# Altium PCB zhuban.PcbDoc
Units mm, origin at the board's own origin, x right, y up, seen from the top; angles counter-clockwise.
Board outline 69 x 58 mm, 2 copper layers (Top Layer, Bottom Layer); 78 components, 82 nets, 426 pads, 204 vias.
Unrouted connection lines stored in the file: 2.
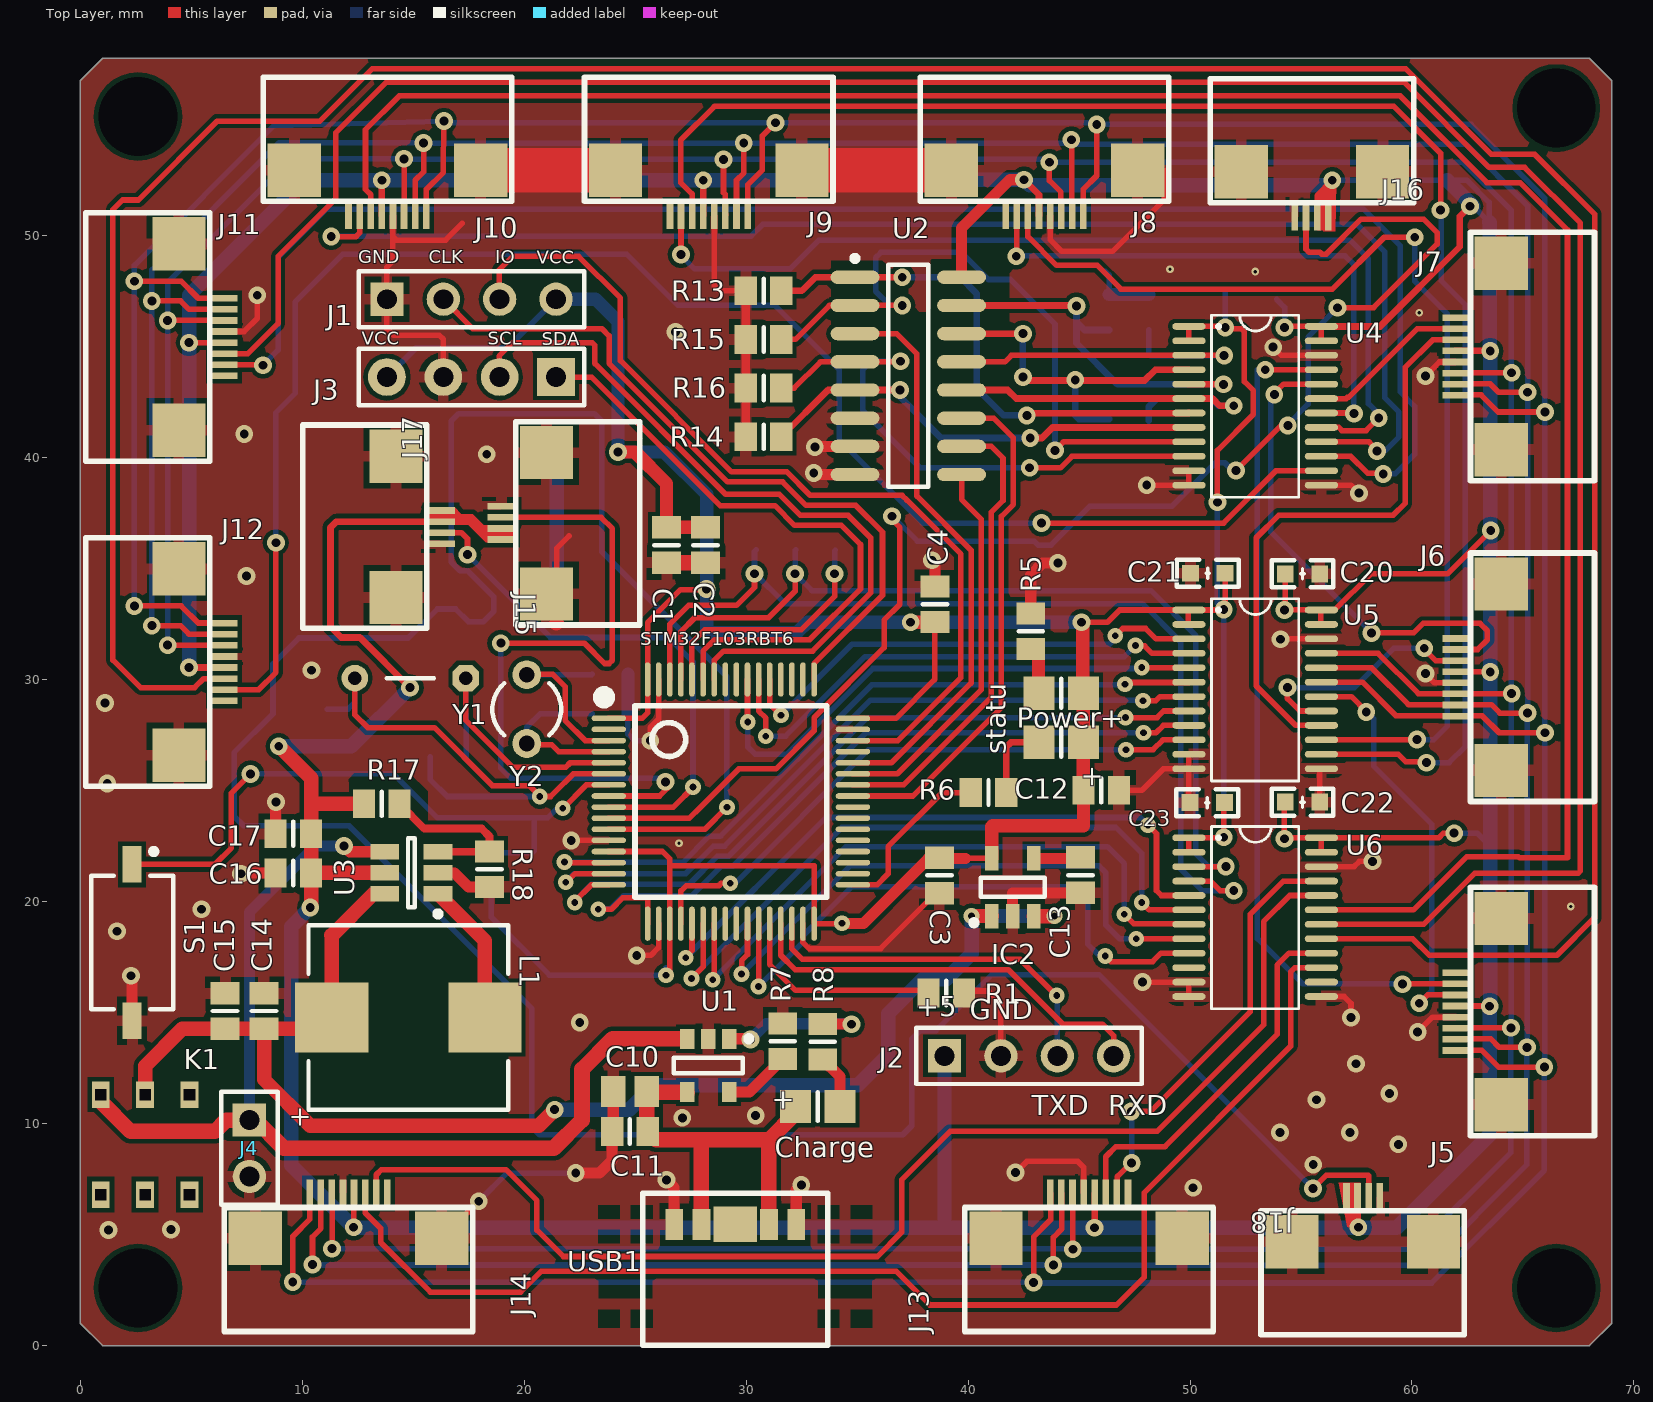
[diagram p0: Top Layer view]
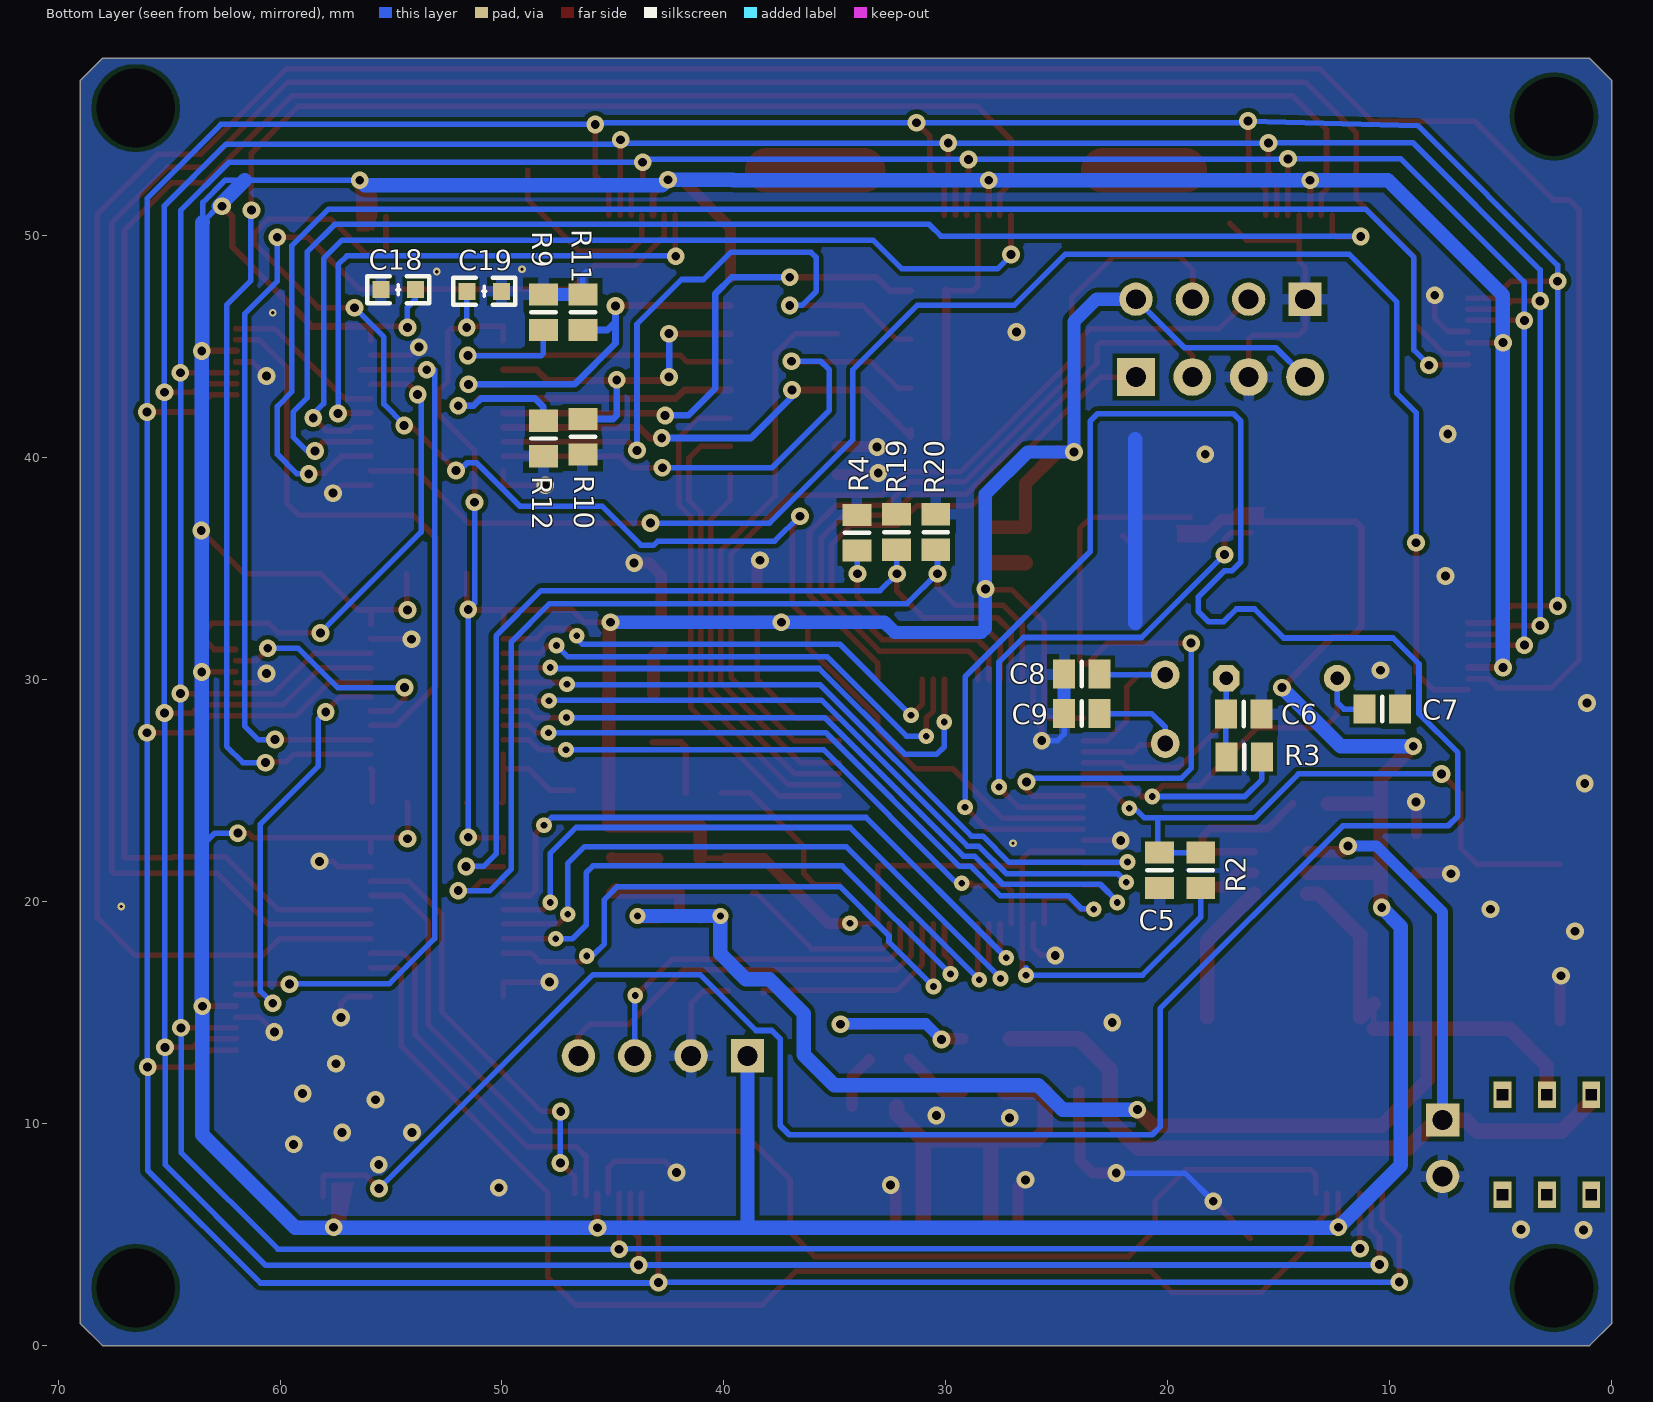
[diagram p1: Bottom Layer view, seen from below]

## Layer stack, top to bottom
Top Solder: solder mask 0.0102, Solder Resist, Dk 3.5
Top Layer: signal copper 0.0356
Dielectric1: dielectric 0.32, FR-4, Dk 4.8
Bottom Layer: signal copper 0.0356
Bottom Solder: solder mask 0.0102, Solder Resist, Dk 3.5

## Board outline
0,1 0,57 1,58 68,58 69,57 69,1 68,0 1,0

## Design rules (kind name [scope] priority, off if disabled: settings)
Clearance [All] p1: gap=0.2 ignorepadtopadclearanceinfootprint=FALSE except(0: Arc-Hole Track-Hole SMDPad-Hole THPad-Hole Via-Hole Fill-Hole Poly-Hole Region-Hole Text-Hole)
Clearance Clearance_1 [InPolygon] p2: gap=0.35 ignorepadtopadclearanceinfootprint=FALSE except(0: Arc-Hole Track-Hole SMDPad-Hole THPad-Hole Via-Hole Fill-Hole Poly-Hole Region-Hole Text-Hole)
ComponentClearance [All] p1 off: gap=0.254 collisioncheckmode=3 verticalgap=0.254 showdistances=FALSE
Height [All] p1 off: minheight=0 maxheight=25.4 prefheight=12.7
HoleSize [All] p1: absolutevalues=TRUE maxlimit=10 minlimit=0.025 maxpercent=80.000 minpercent=20.000
MinimumSolderMaskSliver [All] p1 off: minsoldermaskwidth=0.254
PlaneConnect [All] p1: planeconnectstyle=Relief reliefexpansion=0.508 reliefentries=4 reliefconductorwidth=0.5 reliefairgap=0.3
PolygonConnect PolygonConnect_1 [isvia vs IsPolygon] p1: connectstyle=Direct reliefconductorwidth=0.254 reliefentries=4 polygonreliefangle="90 Angle" airgapwidth=0.254
PolygonConnect [All] p2: connectstyle=Relief reliefconductorwidth=0.5 reliefentries=4 polygonreliefangle="90 Angle" airgapwidth=0.254
RoutingVias [All] p1: holewidth=0.4 width=0.8 viastyle="Through Hole" minholewidth=0.3 minwidth=0.6 maxholewidth=0.508 maxwidth=1.27
SilkToSilkClearance [All] p1 off: silktosilkclearance=0.254
SilkToSolderMaskClearance [IsPad] p1 off: minsilkscreentomaskgap=0.254 clearancetoexposedcopper=TRUE
SolderMaskExpansion [All] p1: expansion=0.102
Width Width_1 [All] p1: maxlimit=10 minlimit=0.1 preferedwidth=0.254 minimp=50.000000 maximp=50.000000 favimp=50.000000
23 further rules are at their usual default settings.

## Classes and differential pairs
component class Sheet1: C1 C2 C3 C4 C5 C6 C7 C8 C9 C10 C11 C12 C13 C14 C15 C16 C17 Charge IC1 IC2 J1 J2 J3 J4 J5 J6 J7 J8 J9 J10 J11 J12 J13 J14 K1 L1 Power R1 R2 R3 R4 R5 R6 R7 R8 R9 R10 R11 R12 R13 R14 R15 R16 R17 R18 R19 R20 S1 statu swd U1 U2 U3 USB1 Y1 Y2
net class Power: +5 BAT BAT+ POWER VCC3.3

## Components (designator, comment, footprint, x,y, rotation, side; value= is the part's Value field where it differs from the comment)
C1 "0.1uf" 6-0805_L 26.416,36.068 r90 top
C2 "1uf" 6-0805_L 28.169,36.068 r90 top
C3 "0.1uf" 6-0805_L 38.71,21.184 r90 top
C4 "0.1uf" 6-0805_L 38.506,33.401 r270 top
C5 "0.1uf" 6-0805_L 20.371,21.412 r90 bottom
C6 "22pF" 6-0805_L 16.586,28.448 r0 bottom
C7 "22pF" 6-0805_L 10.338,28.677 r0 bottom
C8 "22pF" 6-0805_L 23.876,30.251 r180 bottom
C9 "22pF" 6-0805_L 23.876,28.473 r180 bottom
C10 "1uF" C0805 24.765,11.449 r180 top
C11 "0.1uf" 6-0805_L 24.765,9.652 r0 top
C12 "2.2uF" 6-0805_L 45.999,25.019 r180 top
C13 "470pF" 6-0805_L 45.06,21.199 r90 top
C14 "10uF" 6-0805_L 8.28,15.075 r270 top
C15 "0.1uF" 6-0805_L 6.528,15.075 r270 top
C16 "0.1uf" 6-0805_L 9.601,21.285 r0 top
C17 "22uf" 6-0805_L 9.601,23.063 r0 top
C18 "Cap" "C 0603_L" 54.671,47.574 r180 bottom
C19 "Cap" "C 0603_L" 50.8,47.498 r0 bottom
C20 "Cap" "C 0603_L" 55.067,34.773 r180 top
C21 "Cap" "C 0603_L" 50.8,34.798 r0 top
C22 "Cap" "C 0603_L" 55.067,24.486 r180 top
C23 "Cap" "C 0603_L" 50.775,24.46 r0 top
Charge "LED_Green" 6-0805_M 33.223,10.77 r0 top
IC2 "MIC5205-3.3" SOT-23-5 42.012,20.65 r90 top
J1 "CON4" HDR1X4 13.818,47.142 r0 top
J2 "蓝牙" HDR1X4 38.938,13.056 r0 top
J3 "CON4" HDR2.54-LI-4P 17.628,43.637 r180 top
J4 "BAT" HDR1X2 7.62,10.16 r270 top
J5 "CON7" 8P软排线 62,15.047 r90 top locked
J6 "CON7" 8P软排线 62,30.111 r90 top locked
J7 "CON7" 8P软排线 62,44.565 r90 top locked
J8 "CON7" 8P软排线 43.446,50.927 r180 top
J9 "CON7" 8P软排线 28.317,50.927 r180 top locked
J10 "CON7" 8P软排线 13.839,50.927 r180 top locked
J11 "CON7" 8P软排线 6.47,45.438 r270 top locked
J12 "CON7" 8P软排线 6.47,30.8 r270 top locked
J13 "CON7" 8P软排线 45.454,6.858 r0 top locked
J14 "CON7" 8P软排线 12.085,6.858 r0 top locked
J15 "CON4" 软排线4p 20.759,26.128 r90 top
J16 "CON4" 软排线4p 66.412,52.636 r180 top
J17 "CON4" 软排线4p 14.471,47.812 r270 top
J18 "CON4" 软排线4p 46.86,4.928 r0 top
K1 "BUTTON" switch 4.921,11.303 r270 top
L1 "10UH" 0850 14.783,14.783 r0 top
Power "LED_Red" 6-0805_M 44.196,29.388 r180 top
R1 "10K" 6-0805_L 39.014,15.888 r0 top
R2 "10K" 6-0805_L 18.517,21.412 r270 bottom
R3 "10M" 6-0805_L 16.561,26.518 r180 bottom
R4 "10K" 6-0805_L 34.011,36.627 r270 bottom
R5 "1K" 6-0805_L 42.824,32.182 r270 top
R6 "1K" 6-0805_L 40.919,24.917 r0 top
R7 "330" 6-0805_L 31.648,13.716 r90 top
R8 "330" 6-0805_L 33.452,13.691 r270 top
R9 "10K" 6-0805_L 48.133,46.558 r270 bottom
R10 "10K" 6-0805_L 46.355,40.945 r90 bottom
R11 "10K" 6-0805_L 46.355,46.558 r270 bottom
R12 "10K" 6-0805_L 48.133,40.869 r90 bottom
R13 "10K" 6-0805_L 30.785,47.523 r0 top
R14 "10K" 6-0805_L 30.785,40.945 r0 top
R15 "10K" 6-0805_L 30.785,45.331 r0 top
R16 "10K" 6-0805_L 30.785,43.138 r0 top
R17 "525K" 6-0805_L 13.589,24.409 r0 top
R18 "100k" 6-0805_L 18.44,21.463 r270 top
R19 "10K" 6-0805_L 32.233,36.652 r270 bottom
R20 "10K" 6-0805_L 30.455,36.652 r270 bottom
S1 "KEY_2P" button 2.337,18.161 r270 top
statu "LED_Blue" 6-0805_M 44.196,27.178 r180 top (schematic designator Statu)
STM32F103RBT6 "STM32F103RBT6" "LQFP64 10x10_L" 29.312,24.511 r270 top locked
U1 "PW4054" SOT-23-CT5_L 28.296,12.624 r270 top
U2 "CD4051BCM" M16A_N 37.306,43.688 r0 top
U3 "PS7516" SOT23-6_M 14.916,21.3 r180 top
U4 "SN74LVC8T245" SN74LVC8T245 52.934,42.342 r270 top locked
U5 "SN74LVC8T245" SN74LVC8T245 52.934,29.566 r270 top locked
U6 "SN74LVC8T245" SN74LVC8T245 52.934,19.304 r270 top locked
USB1 "USB" Type-C 29.508,5.461 r0 top locked
Y1 "XTAL_8M" xtal 17.374,30.074 r180 top
Y2 "XTAL_32.768K" R38 20.117,28.677 r0 top

## Footprints (in the part's own frame and the unit in brackets; to place one, negate y for a bottom-side part, rotate by r counter-clockwise, add the part's x,y. Pads: shape width x height; smd on the part's side, far side on the other; paste and mask are expansions set on the pad)
6-0805_L [mm] "Chip Resistor, Body 2.0x1.2mm, IPC High Density"
  rect 1x1.3 smd: 1(-0.8,0) 2(0.8,0)
  silkscreen extent 0,-0.55 0,0.55, body extent -1.07,-0.7 1.07,0.7, height 0.7
6-0805_M [mm] "Chip Resistor, Body 2.0x1.2mm, IPC Low Density"
  rect 1.4x1.5 smd: 1(-1,0) 2(1,0)
  silkscreen extent 0,-0.65 0,0.65, body extent -1.07,-0.7 1.07,0.7, height 0.7
8P软排线 [mm] "8P母座"
  rect 0.3x1.25 smd: 1(-1.75,0) 2(-1.25,0) 3(-0.75,0) 4(-0.25,0) 5(0.25,0) 6(0.75,0) 7(1.25,0) 8(1.75,0)
  rect 2.4x2.4 smd: ""(-4.2,-2.025) ""(4.2,-2.025)
  silkscreen extent -5.6,-6.22 5.6,-0.63
0850 [mm] "电感"
  rect 3.3x3.15 smd: 1(-3.45,0) 2(3.45,0)
  silkscreen extent -4.5,-4.15 4.5,4.15, body extent -4.5,-4.15 4.5,4.15, height 5
button [mm] "SODFL, 2-Leads, Body 3.70x8.00mm, IPC Medium Density"
  rect 1.65x0.85 smd: 1(-3.525,0) 2(3.525,0)
  silkscreen extent -4.22,-1.85 3,1.85, body extent -3,-1.85 3,1.85, height 2.5
C0805 [mm] "Chip Capacitor, Body 2.0x1.3mm, IPC High Density"
  rect 1.1x1.4 smd: 1(-0.75,0) 2(0.75,0)
  body extent -1.1,-0.72 1.1,0.72, height 1.4
"C 0603_L" [mil] "无极性贴片电容"
  rect 30x30 smd: 1(-30.59,0) 2(30.59,0)
  silkscreen extent -55,-24 55,24, body extent -31,-16 31,16, height 32
HDR1X2 [mm] "Connector; Header; 2 Position"
  rect 1.5x1.5 hole 0.9: 1(0,0)
  round 1.5 hole 0.9: 2(2.54,0)
  silkscreen extent -1.27,-1.27 3.81,1.27
HDR1X4 [mm] "Connector; Header; 4 Position"
  rect 1.5x1.5 hole 0.9: 1(0,0)
  round 1.5 hole 0.9: 2(2.54,0) 3(5.08,0) 4(7.62,0)
  silkscreen extent -1.27,-1.27 8.89,1.27, body extent -1.27,-1.27 8.89,1.27, height 8.38
HDR2.54-LI-4P [mm] "排针，4脚"
  rect 1.7x1.7 hole 0.9: 1(-3.81,0)
  round 1.7 hole 0.9: 2(-1.27,0) 3(1.27,0) 4(3.81,0)
  silkscreen extent -5.08,-1.27 5.08,1.27, body extent -5.08,-1.27 5.08,1.27, height 8.5
"LQFP64 10x10_L" [mm] "64脚，体宽10x10mm，脚距0.5mm"
  oval 0.25x1.55 smd: 1(-3.75,-5.5) 2(-3.25,-5.5) 3(-2.75,-5.5) 4(-2.25,-5.5) 5(-1.75,-5.5) 6(-1.25,-5.5) 7(-0.75,-5.5) 8(-0.25,-5.5) 9(0.25,-5.5) 10(0.75,-5.5) 11(1.25,-5.5) 12(1.75,-5.5) 13(2.25,-5.5) 14(2.75,-5.5) 15(3.25,-5.5) 16(3.75,-5.5) 33(3.75,5.5) 34(3.25,5.5) 35(2.75,5.5) 36(2.25,5.5) 37(1.75,5.5) 38(1.25,5.5) 39(0.75,5.5) 40(0.25,5.5) 41(-0.25,5.5) 42(-0.75,5.5) 43(-1.25,5.5) 44(-1.75,5.5) 45(-2.25,5.5) 46(-2.75,5.5) 47(-3.25,5.5) 48(-3.75,5.5)
  oval 1.55x0.25 smd: 17(5.5,-3.75) 18(5.5,-3.25) 19(5.5,-2.75) 20(5.5,-2.25) 21(5.5,-1.75) 22(5.5,-1.25) 23(5.5,-0.75) 24(5.5,-0.25) 25(5.5,0.25) 26(5.5,0.75) 27(5.5,1.25) 28(5.5,1.75) 29(5.5,2.25) 30(5.5,2.75) 31(5.5,3.25) 32(5.5,3.75) 49(-5.499,3.75) 50(-5.499,3.25) 51(-5.499,2.75) 52(-5.499,2.25) 53(-5.499,1.75) 54(-5.499,1.25) 55(-5.499,0.75) 56(-5.499,0.25) 57(-5.499,-0.25) 58(-5.499,-0.75) 59(-5.499,-1.25) 60(-5.499,-1.75) 61(-5.499,-2.25) 62(-5.499,-2.75) 63(-5.499,-3.25) 64(-5.499,-3.75)
  silkscreen extent -4.95,-5.96 4.32,4.32, body extent -6,-6 6,6, height 1.45
M16A_N [mm] "SOIC, 16-Leads, Body 9.9x3.9mm, Pitch 1.27mm, IPC Medium Density"
  oval 2.2x0.6 smd: 1(-2.4,4.445) 2(-2.4,3.175) 3(-2.4,1.905) 4(-2.4,0.635) 5(-2.4,-0.635) 6(-2.4,-1.905) 7(-2.4,-3.175) 8(-2.4,-4.445) 9(2.4,-4.445) 10(2.4,-3.175) 11(2.4,-1.905) 12(2.4,-0.635) 13(2.4,0.635) 14(2.4,1.905) 15(2.4,3.175) 16(2.4,4.445)
  silkscreen extent -2.52,-5 0.9,5.42, body extent -2,-5 2,5, height 1.75
R38 [mm] "Crystal, Thru-Hole; 2 Leads; Body 3.1 x 8.2 mm (Dia.xH)"
  round 1.3 hole 0.7: 1(0,1.55) 2(0,-1.55)
  silkscreen extent -1.55,-1.19 1.55,1.17
SN74LVC8T245 [mm]
  oval 0.3x1.5 smd mask+0.102: 1(-3.575,-2.985) 2(-2.925,-2.985) 3(-2.275,-2.985) 4(-1.625,-2.985) 5(-0.975,-2.984) 6(-0.325,-2.984) 7(0.325,-2.984) 8(0.975,-2.984) 9(1.625,-2.984) 10(2.275,-2.984) 11(2.925,-2.984) 12(3.575,-2.984) 13(3.575,2.985) 14(2.925,2.985) 15(2.275,2.985) 16(1.625,2.985) 17(0.975,2.984) 18(0.325,2.984) 19(-0.325,2.984) 20(-0.975,2.984) 21(-1.625,2.984) 22(-2.275,2.984) 23(-2.925,2.984) 24(-3.575,2.984)
  silkscreen extent -4.08,-1.97 4.13,1.97, body extent -3.95,-3.25 3.95,3.3, height 1.2
SOT23-6_M [mm] "SOT23, 6-Leads, Body 2.9x1.6mm, Pitch 0.95mm, Lead Span 2.7mm, IPC Low Density"
  rect 1.3x0.7 smd: 1(-1.2,0.95) 2(-1.2,0) 3(-1.2,-0.95) 4(1.2,-0.95) 5(1.2,0) 6(1.2,0.95)
  silkscreen extent -1.33,-1.55 0.15,1.97, body extent -0.9,-1.55 0.9,1.55, height 1.45
SOT-23-5 [mm]
  rect 1.1x0.6 smd: 1(-1.3,0.95) 2(-1.3,0) 3(-1.3,-0.95) 4(1.3,-0.95) 5(1.3,0.95)
  silkscreen extent -1.72,-1.45 0.42,1.87, body extent -1.37,-1.45 1.43,1.45, height 1.45
SOT-23-CT5_L [mm] "SOT23, 5-Leads, Body 2.9x1.6mm, Pitch 0.95mm, Lead Span 2.7mm, IPC High Density"
  rect 0.9x0.65 smd: 1(-1.2,0.95) 2(-1.2,0) 3(-1.2,-0.95) 4(1.2,-0.95) 5(1.2,0.95)
  silkscreen extent -1.32,-1.55 0.35,1.95, body extent -0.9,-1.55 0.9,1.55, height 1.45
switch [mm]
  rect 1.2x0.8 hole 0.5 square: 1(0,0) 2(0,-2) 3(0,-4) 4(4.5,0) 5(4.5,-2) 6(4.5,-4)
Type-C [mm] "贴片母头"
  rect 0.8x1.4 smd: 1(-2.75,0) 1(2.75,0) 2(-1.52,0) 2(1.52,0) ""(-0.5,0) ""(0.5,0)
  rect 1.95x1.2 smd: ""(0,0) ""(0,0)
  rect 1.95x1.6 smd: ""(0,0) ""(0,0)
  silkscreen extent -4.17,-5.44 4.17,1.4
xtal [mm]
  oct 1.2x1.2 hole 0.6: 1(0,0)
  round 1.2 hole 0.6: 2(5,0)
  silkscreen extent 1.43,0 3.56,0
软排线4p [mm]
  rect 0.3x1.25 smd: 1(11.688,1.778) 2(11.188,1.778) 3(10.688,1.778) 4(10.188,1.778)
  rect 2.4x2.4 smd: ""(7.738,-0.247) ""(14.106,-0.247)
  silkscreen extent 6.34,-4.45 15.49,1.14

## Part data
C1 C2 C3 C4 C5 C6 C7 C8 C9 C11 C12 C13 C14 C15 C16 C17: library part "Cap Semi", "Capacitor (Semiconductor SIM Model)"
C10: library part "Cap Pol3", "Polarized Capacitor (Surface Mount)"
C18 C19 C20 C21 C22 C23: "Capacitor"
Charge Power statu: library part LED, "LED"
IC2: "稳压"
J1: "连接器"
J2: library part CON4, "Connector"
J3 J5 J6 J7 J8 J9 J10 J11 J12 J13 J14 J15 J16 J17 J18: "Connector"
J4 USB1: library part CON2, "Conjunctor"
K1: "自锁按键"
L1: library part Inductor, "电感"
R1 R2 R3 R4 R5 R6 R7 R8 R9 R10 R11 R12 R13 R14 R15 R16 R17 R18 R19 R20: library part Res3, "Resistor"
S1: "轻触按键2P"
STM32F103RBT6: "STM32 ARM-based 32-bit MCU with 128 Kbytes Flash, 64-pin LQFP, Industrial Temperature"
U2: "8-Channel Analog Multiplexer/Demultiplexer"
Y1 Y2: library part XTAL, "Crystal Oscillator"

## Free pads (board coordinates)
  rect 1.2x0.8 hole 3.556: ""(2.6,2.6) ""(2.6,55.372) ""(66.5,2.6) ""(66.5,55.753)

## Via types
v1: diameter 0.8, hole 0.4, Top Layer to Bottom Layer, tented both sides, 157 vias
v2: diameter 0.711, hole 0.305, Top Layer to Bottom Layer, tented both sides, 35 vias
v3: diameter 0.8, hole 0.4, Top Layer to Bottom Layer, 7 vias
v4: diameter 0.35, hole 0.15, Top Layer to Bottom Layer, tented both sides, 5 vias

## Nets (pads, with @x,y where several pads share a name; then routed paths per layer and width w, separated by ;. In a path a pad name is that pad's centre, name@x,y a point inside that pad or via, vN(x,y) a via of type N, cw(c..) or ccw(c..) an arc to the next point about the centre after c; other vN are vias at no path point)
+5: C16.2 C17.2 C18.2 C20.2 C22.2 J2.1 J5.5 J6.5 J7.5 J8.5 J9.5 J10.5 J11.5 J12.5 J13.5 J14.5 J15.3 J15.4 J16.3 J16.4 J17.3 J17.4 J18.3 J18.4 R17.1 U2.16 U3.5 U4.23 U4.24 U5.23 U5.24 U6.23 U6.24 | length 298.9
  Top Layer w0.25: v1@4.978,45.187 J11.5@6.477,45.187 ; v1@12.328,5.293 J14.5@12.328,6.858 ; v1(54.254,22.835) 54.254,24.45 C22.2 ; v1@54.254,33.096 v1(54.254,33.147) ; v1(54.254,45.872) 54.299,45.917 U4.24 U4.23 ; C20.2 54.29,33.183 v1(54.254,33.147) ; v1@54.299,22.879 U6.24 ; U6.23 U6.24 ; U5.23 55.88,32.491 55.88,33.096 55.829,33.147 v1(54.254,33.147) ; U5.24 56.518,33.141 58.15,34.773 61.595,34.773 v1(63.551,36.728) ; v1@61.9,22.835 v1(61.9,23.089) 61.417,23.089 61.208,22.879 U6.24 ; J5.5@61.976,15.3 v1@63.541,15.3 ; J6.5@62.001,30.362 v1@63.567,30.362
  Top Layer w0.254: J16.3 55.724,51.816 v3(56.41,52.502)
  Top Layer w0.3: v1(4.902,30.556) 4.902,30.48 4.972,30.55 J12.5 ; v1(4.902,45.187) 4.902,45.11 v1@4.978,45.187 ; J10.5 13.589,52.426 13.513,52.502 v1(13.589,52.502) ; v3(14.859,29.642) 12.598,31.902 11.76,31.902 11.278,32.385 11.278,36.857 11.544,37.124 J17.3 ; J9.5 v1(28.067,52.502) ; v1(42.52,52.527) 43.196,51.851 J8.5 ; v1@45.695,5.258 45.704,5.267 J13.5@45.704,6.833 ; U4.24 58.566,45.917 62.154,49.505 62.154,50.876 v1(62.611,51.333) ; v1@57.531,5.334 57.548,5.351 J18.3 ; J7.5@61.951,44.815 J7.5 63.516,44.815 v1(63.525,44.806) ; v1@63.541,15.3 v1@63.551,15.291 ; v1@63.567,30.362 v1@63.576,30.353
  Top Layer w0.5: U2.16 39.706,50.349 41.885,52.527 v1(42.52,52.527)
  Top Layer w0.65: v1@8.915,27.051 10.401,25.565 10.401,24.384 ; v1(10.363,19.736) 10.401,19.774 C16.2 ; R17.1 10.427,24.409 10.401,24.384 ; U3.5 10.416,21.3 C16.2 ; C16.2 C17.2 10.401,24.384
  Bottom Layer w0.25: 53.899,47.142 54.265,46.776 54.265,45.883 v1(54.254,45.872) ; v1(61.9,23.089) 62.941,23.089 63.475,22.555 63.525,22.555
  Bottom Layer w0.254: v3(56.41,52.502) 61.595,52.502 62.48,52.502 63.475,51.507 63.475,50.622 62.763,51.333 v1(62.611,51.333)
  Bottom Layer w0.5: 39.573,52.502 39.599,52.476
  Bottom Layer w0.65: v1(4.902,30.556) v1(4.902,45.187) 4.902,47.32 10.084,52.502 v1(13.589,52.502) v1(28.067,52.502) 39.573,52.502 39.599,52.527 v1(42.52,52.527) 42.774,52.273 56.181,52.273 v3(56.41,52.502) ; v1(8.941,27) 12.217,27 v3(14.859,29.642) ; v1(10.363,19.736) 9.5,18.872 9.5,8.128 12.319,5.309 38.938,5.309 ; J2.1 38.938,5.309 ; 61.595,52.502 v1@62.763,51.333 ; 63.475,50.622 63.5,50.597 v1@63.5,44.806 ; v1(63.525,44.806) v1(63.525,30.353) 63.525,22.555 63.525,15.316 v1(63.5,15.291) 63.5,9.5 59.309,5.309 v1(45.695,5.309) 38.938,5.309
  other v1: 12.319,5.334 57.582,5.334
ADC0: STM32F103RBT6.14 U5.6 | length 33.6
  Top Layer w0.25: v2(21.819,21.793) 21.851,21.761 STM32F103RBT6.14 ; v2(47.066,29.794) 47.148,29.876 49.934,29.876 U5.6
  Bottom Layer w0.25: v2@21.819,21.768 v2@21.844,21.768 ; v2(21.819,21.793) v2@21.844,21.768 ; v2@47.117,29.769 35.659,29.769 28.845,22.955 28.336,22.955 27.148,21.768 v2@21.844,21.768
ADC1: STM32F103RBT6.15 U5.7 | length 33.7
  Top Layer w0.25: v2(21.869,20.879) 21.918,20.879 22.299,21.261 STM32F103RBT6.15 ; v2(47.879,29.058) 48.463,29.058 48.646,29.241 U5.7
  Bottom Layer w0.25: v2(21.869,20.879) 22.25,21.26 27.277,21.26 28.522,22.505 29.032,22.505 35.61,29.083 47.879,29.083 v2@47.904,29.058
ADC2: STM32F103RBT6.16 U5.8 | length 33.2
  Top Layer w0.25: v2(22.276,19.964) 22.25,19.99 23.021,20.761 STM32F103RBT6.16 ; v2(47.092,28.296) 48.514,28.296 48.809,28.591 U5.8
  Bottom Layer w0.25: v2(22.276,19.964) 22.25,19.99 23.045,20.784 27.438,20.784 28.709,22.055 29.218,22.055 35.459,28.296 v2(47.092,28.296) v2@47.117,28.296
ADC3: STM32F103RBT6.17 U5.9 | length 33.7
  Top Layer w0.25: v2(23.343,19.66) 23.927,19.66 24.451,20.184 25.562,20.184 STM32F103RBT6.17 ; v2(47.904,27.61) 48.465,27.61 48.795,27.941 U5.9
  Bottom Layer w0.25: v2@23.343,19.685 23.901,19.685 24.486,20.269 27.559,20.269 28.895,21.605 29.405,21.605 35.409,27.61 v2(47.904,27.61) v2@47.93,27.61
ADC4: STM32F103RBT6.20 U5.10 | length 27.2
  Top Layer w0.25: STM32F103RBT6.20 27.062,20.483 27.305,20.726 28.778,20.726 28.804,20.752 ; v2(47.117,26.848) 48.339,26.848 48.782,27.291 U5.10
  Top Layer w0.254: 28.804,20.752 28.88,20.828 v2(29.286,20.828)
  Bottom Layer w0.25: v2(29.286,20.828) 29.489,20.828 35.509,26.848 v2(47.117,26.848)
ADC5: STM32F103RBT6.21 U6.5 | length 30
  Top Layer w0.25: v2(27.28,17.475) 27.28,17.526 27.562,17.808 STM32F103RBT6.21 ; v2(48.108,23.444) 48.489,23.063 48.489,20.498 48.707,20.279 U6.5
  Bottom Layer w0.25: v2(27.28,17.475) 33.597,23.793 47.759,23.793 v2(48.108,23.444) v2@48.158,23.393
ADC6: STM32F103RBT6.22 U6.6 | length 30.8
  Top Layer w0.25: v2(27.534,16.535) 28.062,17.063 STM32F103RBT6.22 ; v2(47.828,19.964) 48.164,19.629 U6.6
  Bottom Layer w0.25: v2(27.534,16.535) 27.534,16.561 34.315,23.343 46.66,23.343 47.828,22.174 v2(47.828,19.964)
ADC7: STM32F103RBT6.23 U6.7 | length 29.3
  Top Layer w0.25: v2(28.499,16.485) 28.562,16.547 STM32F103RBT6.23 ; v2(47.041,19.431) 47.462,19.01 49.919,19.01 U6.7
  Bottom Layer w0.25: v2(28.499,16.485) 34.493,22.479 46.279,22.479 47.041,21.717 v2(47.041,19.431) v2@47.041,19.406
ADC8: STM32F103RBT6.26 U6.8 | length 27.3
  Top Layer w0.25: v2(29.794,16.739) 29.794,17.348 30.062,17.616 STM32F103RBT6.26 ; v2(47.574,18.329) U6.8
  Bottom Layer w0.25: v2(29.794,16.739) 34.671,21.615 45.898,21.615 46.203,21.311 46.203,18.948 46.822,18.329 v2(47.574,18.329) v2@47.6,18.329
ADC9: STM32F103RBT6.27 U6.9 | length 27
  Top Layer w0.25: v2@30.562,16.205 STM32F103RBT6.27 ; v2(46.177,17.551) 46.431,17.297 48.31,17.297 48.692,17.679 U6.9
  Bottom Layer w0.25: v2(30.556,16.18) 32.563,18.186 32.563,18.466 34.773,20.676 44.806,20.676 45.39,20.091 45.39,18.085 45.822,17.653 v2@46.05,17.653
  Bottom Layer w0.254: v2@46.05,17.653 46.152,17.551 v2(46.177,17.551)
ADC_0: J5.6 U5.18 | length 18.7
  Top Layer w0.25: U5.18 57.272,29.241 v1@57.963,28.55 ; v1(60.329,15.422) 60.704,15.797 J5.6
  Bottom Layer w0.25: v1@57.963,28.55 58.268,28.245 58.268,26.111 60.884,23.495 60.884,15.977 v1(60.329,15.422)
  other v1: 57.937,28.55
ADC_1: J6.6 U5.17 | length 10.9
  Top Layer w0.25: v1(54.385,29.646) 54.385,29.155 54.95,28.591 U5.17 ; v1(60.554,31.42) 60.554,31.369 61.062,30.861 J6.6
  Bottom Layer w0.25: v1(54.385,29.646) 57.408,29.646 59.182,31.42 v1(60.554,31.42)
ADC_2: J7.6 U5.16 | length 26.6
  Top Layer w0.25: U5.16 54.762,27.941 52.984,29.718 52.984,36.398 54,37.414 59.157,37.414 59.69,37.948 59.69,44.069 60.936,45.315 J7.6
ADC_3: J8.6 U5.15 | length 48.9
  Top Layer w0.25: J8.6 42.696,49.963 43.993,48.666 45.822,48.666 46.888,47.6 56.413,47.6 58.75,49.936 v1(60.122,49.936) ; U5.15 v1@60.223,27.291
  Bottom Layer w0.25: v1(60.122,49.936) 60.122,47.955 61.595,46.482 61.595,27.915 60.985,27.305 v1(60.223,27.305)
ADC_4: J9.6 U5.14 | length 73.2
  Top Layer w0.25: J9.6 27.567,51.884 27.051,52.4 27.051,54.305 28.575,55.829 59.182,55.829 61.29,53.721 v1(61.29,51.156) ; U5.14 59.389,26.641 59.715,26.314 v1@60.731,26.314
  Bottom Layer w0.25: v1(60.655,26.264) 61.671,26.264 62.408,27 62.408,46.888 61.316,47.981 v1@61.316,50.876
ADC_5: J10.6 U6.19 | length 101.6
  Top Layer w0.25: J10.6 13.089,51.859 12.852,52.095 12.852,54.788 14.376,56.312 59.461,56.312 63.373,52.4 64.872,52.4 67.005,50.267 67.005,21.971 64.846,21.971 64.795,22.022 62.459,22.022 60.066,19.629 U6.19
ADC_6: J11.6 U6.18 | length 114.2
  Top Layer w0.25: J11.6 6.502,44.679 7.544,44.679 8.915,46.05 8.915,49.073 11.506,51.664 11.506,54.635 13.792,56.921 59.639,56.921 63.475,53.086 65.075,53.086 67.589,50.571 67.589,21.387 67.488,21.285 62.829,21.285 60.523,18.979 U6.18
ADC_7: J12.6 U6.17 | length 143.1
  Top Layer w0.25: J12.6 5.564,30.05 5.156,29.642 2.718,29.642 1.473,30.886 1.473,51.181 1.905,51.613 2.616,51.613 6.172,55.169 10.795,55.169 13.151,57.525 59.722,57.525 63.576,53.67 65.532,53.67 68.224,50.978 68.224,19.279 66.523,17.577 60.782,17.577 60.03,18.329 U6.17
ADC_8: J13.6 U6.16 | length 17.1
  Top Layer w0.25: J13.6@46.203,6.756 46.203,8.509 46.66,8.966 48.871,8.966 53.924,14.019 53.924,17.145 54.458,17.679 U6.16
ADC_9: J14.6 U6.15 | length 57.3
  Top Layer w0.25: J14.6 12.835,5.986 13.538,5.283 13.538,4.648 15.773,2.413 19.837,2.413 20.777,3.353 36.754,3.353 38.278,1.829 46.685,1.829 47.93,3.073 47.93,6.883 54.534,13.487 54.534,16.84 54.723,17.029 U6.15
"Address 3": J5.1 J6.1 J7.1 J8.1 J9.1 J10.1 J11.1 J12.1 J13.1 J14.1 U5.19 | length 236.2
  Top Layer w0.25: v1@2.413,33.325 v1(2.438,33.325) 4.547,33.325 5.315,32.556 J12.1@6.477,32.556 ; v1@2.413,47.955 v1(2.438,47.955) 4.547,47.955 5.315,47.187 J11.1@6.477,47.187 ; v1(9.576,2.87) 9.576,4.928 10.344,5.696 J14.1@10.344,6.858 ; J10.1 15.589,52.089 16.358,52.857 v1(16.383,55.169) v1@16.358,54.991 ; J9.1 30.067,52.292 30.734,52.959 30.734,54.508 v1(31.318,55.093) ; v1(42.951,2.845) 42.951,4.902 43.72,5.671 43.72,6.833 J13.1 ; J8.1@45.18,50.927 45.18,52.089 45.796,52.705 v1(45.796,55.016) ; U5.19 57.765,29.891 59.277,28.378 63.163,28.378 63.932,27.61 v1(65.989,27.61) v1@66.04,27.61 ; J7.1@61.951,42.831 63.112,42.831 63.881,42.062 v1(65.989,42.062) ; J5.1@61.976,13.316 63.138,13.316 63.906,12.548 v1(65.964,12.548) v1@66.015,12.548
  Bottom Layer w0.25: v1(2.438,33.325) v1(2.438,47.955) 2.438,48.666 8.738,54.966 v1(16.383,55.169) 16.459,55.093 v1(31.318,55.093) 45.72,55.093 v1(45.796,55.016) 62.662,55.016 65.989,51.689 v1(65.989,42.062) v1(65.989,27.61) 65.989,12.573 v1(65.964,12.548) 65.964,7.899 60.884,2.819 v1@42.926,2.819 ; v1(9.576,2.87) 9.601,2.845 v1(42.951,2.845)
"Address 4": J5.2 J6.2 J7.2 J8.2 J9.2 J10.2 J11.2 J12.2 J13.2 J14.2 U5.20 | length 222.4
  Top Layer w0.25: v1(3.226,32.436) 4.521,32.436 4.901,32.056 J12.2@6.477,32.056 ; v1(3.226,47.066) 4.521,47.066 4.901,46.687 J11.2@6.477,46.687 ; v1(10.465,3.658) 10.465,4.902 10.844,5.282 J14.2@10.844,6.858 ; J10.2 15.089,52.503 15.469,52.883 v1(15.469,54.178) ; J9.2 29.567,52.503 29.896,52.832 v1(29.896,54.178) ; v1@43.84,3.581 v1(43.84,3.632) 43.84,4.877 44.22,5.256 44.22,6.833 J13.2 ; v1(44.653,54.331) 44.68,54.304 J8.2@44.68,50.927 ; U5.20 58.182,30.541 59.844,28.878 63.578,28.878 63.957,28.499 v1(65.202,28.499) v1@65.253,28.499 ; J7.2@61.951,43.331 63.527,43.331 63.906,42.951 v1(65.202,42.951) ; J5.2@61.976,13.816 63.552,13.816 63.932,13.437 v1(65.176,13.437) v1@65.227,13.437
  Bottom Layer w0.25: v1(3.226,32.436) 3.212,32.45 3.212,47.052 v1(3.226,47.066) 3.226,48.463 8.955,54.192 15.455,54.192 v1(15.469,54.178) v1(29.896,54.178) 44.501,54.178 v1(44.653,54.331) 44.856,54.127 62.433,54.127 65.216,51.345 65.216,42.965 v1(65.202,42.951) 65.216,42.938 65.216,28.513 v1(65.202,28.499) 65.202,13.462 v1(65.176,13.437) 65.176,8.153 60.641,3.618 43.854,3.618 v1(43.84,3.632) 10.49,3.632 v1(10.465,3.658)
"Address 5": J5.3 J6.3 J7.3 J8.3 J9.3 J10.3 J11.3 J12.3 J13.3 J14.3 U5.21 | length 209.9
  Top Layer w0.25: v1(3.937,31.556) J12.3@6.477,31.556 ; v1(3.937,46.187) J11.3@6.477,46.187 ; v1(11.344,4.369) J14.3@11.344,6.858 ; J10.3 v1(14.589,53.467) ; v1(28.981,53.442) 28.981,51.943 29.058,51.867 29.058,50.968 29.083,50.943 J9.3 ; v1(43.663,53.315) 43.663,52.486 44.18,51.968 J8.3@44.18,50.927 ; J13.3 44.72,6.833 v1(44.72,4.343) v1@44.72,4.293 ; U5.21 58.471,31.191 60.284,29.378 v1(64.491,29.378) v1@64.541,29.378 ; J7.3@61.951,43.831 v1(64.491,43.831) ; J5.3@61.976,14.316 v1(64.465,14.316) v1@64.516,14.316
  Bottom Layer w0.25: v1(3.937,31.556) 3.951,31.57 3.951,46.173 v1(3.937,46.187) 3.951,46.2 3.951,47.918 9.5,53.467 v1(14.589,53.467) 14.614,53.442 v1(28.981,53.442) 43.536,53.442 v1(43.663,53.315) 62.306,53.315 64.477,51.144 v1@64.477,43.845 ; v1(11.344,4.369) 11.356,4.357 44.706,4.357 v1(44.72,4.343) ; v1@44.734,4.357 v1(44.72,4.343) ; v1@64.451,14.33 v1(64.465,14.316) ; v1(44.72,4.343) 60.096,4.343 64.451,8.698 64.451,14.302 v1(64.465,14.316) ; v1(64.465,14.316) 64.477,14.328 64.477,29.365 v1(64.491,29.378) 64.477,29.392 v1@64.477,43.817 ; v1@64.477,43.817 v1@64.477,43.845 ; v1@64.477,43.817 v1(64.491,43.831) v1@64.477,43.845
Address_0: STM32F103RBT6.41 U2.11 | length 23.4
  Top Layer w0.25: STM32F103RBT6.41 37.512,24.761 41.504,28.753 41.504,37.363 42.037,37.897 42.037,40.894 41.148,41.783 U2.11
Address_1: STM32F103RBT6.42 U2.10 | length 21
  Top Layer w0.25: STM32F103RBT6.42 37.097,25.261 41.054,29.217 41.054,37.55 41.573,38.069 41.573,39.987 41.046,40.513 U2.10
Address_2: STM32F103RBT6.43 U2.9 | length 17.4
  Top Layer w0.25: STM32F103RBT6.43 36.81,25.761 40.589,29.54 40.589,37.236 39.706,38.119 U2.9
Address_3: STM32F103RBT6.55 U5.5 | length 24.7
  Top Layer w0.25: v2@30.062,28.092 STM32F103RBT6.55 ; v2(47.828,30.556) 47.844,30.541 U5.5
  Bottom Layer w0.25: v2(30.074,28.092) 30.074,26.975 30.404,26.645 31.852,26.645 35.712,30.505 v2@47.828,30.505
Address_4: STM32F103RBT6.54 U5.4 | length 23.9
  Top Layer w0.25: STM32F103RBT6.54 30.562,28.595 30.886,28.27 30.886,27.737 31.013,27.61 30.886,27.483 v2(30.886,27.457) ; v2(47.549,31.547) 47.574,31.521 47.955,31.521 48.286,31.191 U5.4
  Bottom Layer w0.25: v2(30.886,27.457) 31.775,27.457 35.357,31.039 47.041,31.039 v2(47.549,31.547) v2@47.549,31.369
Address_5: STM32F103RBT6.53 U5.3 | length 22.1
  Top Layer w0.25: STM32F103RBT6.53 31.062,28.908 v2(31.572,28.397) ; v2@46.634,31.973 46.97,32.309 48.001,32.309 48.469,31.841 U5.3
  Bottom Layer w0.25: v2(31.572,28.397) 34.773,31.598 46.38,31.598 46.634,31.852 v2(46.634,31.979)
BAT: J4.1 K1.3 U1.3 U3.4 | length 48.2
  Top Layer w0.254: U1.3@27.102,13.824 U1.3
  Top Layer w0.5: v1(11.887,22.504) 12.141,22.25 U3.4
  Top Layer w0.7: K1.3 0.921,10.992 2.266,9.647 6.066,9.647 6.579,10.16 J4.1 7.899,10.16 9.169,8.89 21.336,8.89 22.606,10.16 22.606,12.446 23.984,13.824 U1.3@27.102,13.824
  Bottom Layer w0.5: J4.1 7.62,19.533 10.592,22.504 v1(11.887,22.504)
BAT+: C14.2 C15.2 IC2.1 IC2.3 K1.2 L1.1 U3.6 | length 65.2
  Top Layer w0.254: L1.1@10.723,14.275 L1.1@10.723,15.392
  Top Layer w0.65: K1.2 2.921,12.598 4.597,14.275 C15.2 C14.2 ; L1.1@10.723,14.275 C14.2 ; L1.1@10.723,15.392 L1.1 11.333,18.47 ; 11.312,18.491 11.333,18.47 ; U3.6 13.213,20.35 11.333,18.47 ; v1(21.374,10.63) 20.65,9.906 10.363,9.906 8.28,11.989 C14.2 ; v2(40.157,19.355) 41.057,19.355 IC2.1 ; IC2.3 43.887,19.35 v2(43.891,19.355)
  Bottom Layer w0.65: v1(21.374,10.63) 24.727,10.63 25.832,11.735 35.027,11.735 36.398,13.106 36.398,14.961 37.948,16.51 39.014,16.51 40.157,17.653 v2@40.157,19.279 ; v2(40.157,19.355) v2(43.891,19.355)
BOOT0: R4.2 STM32F103RBT6.60 | length 11
  Top Layer w0.25: STM32F103RBT6.60 27.559,30.099 27.559,31.674 28.143,32.258 32.487,32.258 33.985,33.757 v1(33.985,34.773)
  Bottom Layer w0.25: v1(33.985,34.773) 33.985,35.801 R4.2
BOOT1: R1.1 STM32F103RBT6.28 | length 9.7
  Top Layer w0.25: STM32F103RBT6.28 31.062,17.173 32.233,16.002 38.1,16.002 R1.1 R1.1@38.227,15.875
  Top Layer w0.254: R1.1@38.214,16.002 R1.1 38.214,15.875 R1.1@38.227,15.875
Common_Out: STM32F103RBT6.44 U2.3 | length 25.8
  Top Layer w0.25: STM32F103RBT6.44 36.548,26.261 40.139,29.852 40.139,35.832 37.694,38.278 37.694,44.679 36.779,45.593 U2.3
EX0: R9.2 U2.13 U4.3 | length 16.5
  Top Layer w0.25: U2.13 41.656,44.323 41.95,44.617 U4.3 51.522,44.617 v1(51.537,44.602)
  Bottom Layer w0.25: R9.2 48.133,44.704 48.235,44.602 v1(51.537,44.602)
EX1: R10.2 U2.14 U4.4 | length 15.7
  Top Layer w0.3: U2.14 v1(42.469,45.593) ; v1(42.469,43.637) 42.621,43.485 47.956,43.485 48.438,43.967 U4.4
  Bottom Layer w0.3: v1(42.469,43.637) v1(42.469,45.593) ; v1(44.831,43.51) 44.831,41.907 44.993,41.745 R10.2
EX2: R11.2 U2.15 U4.5 | length 17.5
  Top Layer w0.3: U2.15 v1@44.958,46.863 ; U4.5 51.501,43.317 v1(51.511,43.307)
  Bottom Layer w0.3: v1(44.882,46.838) 44.882,46.126 ; R11.2 45.25,45.758 44.882,46.126 ; v1(51.511,43.307) 46.736,43.307 44.882,45.161 44.882,46.126
EX3: R12.2 U2.12 U4.6 | length 17.3
  Top Layer w0.3: U2.12 41.783,43.053 42.169,42.667 U4.6 51.008,42.667 51.333,42.342 v1(51.968,42.342)
  Bottom Layer w0.3: R12.2 48.133,42.291 48.514,42.672 50.952,42.672 51.283,42.342 v1(51.968,42.342)
EX4: R13.2 U2.1 U4.7 | length 23.7
  Top Layer w0.3: R13.2 32.512,47.523 33.122,48.133 U2.1 v1(37.033,48.133) ; v1(42.647,41.91) 42.748,42.012 49.944,42.012 U4.7
  Bottom Layer w0.3: v1(37.033,48.133) 39.649,48.133 40.386,47.396 40.386,43.129 41.605,41.91 v1(42.647,41.91)
EX5: R14.2 U2.5 U4.8 | length 20.8
  Top Layer w0.3: R14.2@31.585,41.262 R14.2 33.693,43.053 U2.5 v1(36.932,43.053) ; v1(42.799,40.894) 43.332,40.894 43.805,41.367 U4.8
  Bottom Layer w0.3: v1(36.932,43.053) 36.932,42.748 38.786,40.894 v1(42.799,40.894)
EX6: R15.2 U2.2 U4.9 | length 30.5
  Top Layer w0.25: R15.2 32.224,45.331 33.757,46.863 U2.2@33.807,46.863 ; U2.2 v1(37.033,46.863) ; v1(43.917,40.335) 44.298,40.717 U4.9
  Top Layer w0.254: U2.2@33.807,46.863 U2.2
  Bottom Layer w0.25: v1(37.033,46.863) 36.474,46.863 35.839,47.498 35.839,49.022 36.068,49.251 39.7,49.251 40.919,48.031 41.91,48.031 43.917,46.025 v1(43.917,40.335)
EX7: R16.2 U2.4 U4.10 | length 25.5
  Top Layer w0.25: R16.2 32.165,43.138 33.35,44.323 U2.4 v1@36.932,44.323 ; v1(42.774,39.548) 44.154,39.548 44.674,40.067 U4.10
  Bottom Layer w0.25: v1(36.957,44.348) 35.636,44.348 35.255,43.967 35.255,42.139 37.846,39.548 v1(42.774,39.548) v1@42.799,39.548
EX8: R19.2 STM32F103RBT6.61 U6.3 | length 42.2
  Top Layer w0.25: STM32F103RBT6.61 27.062,32.167 27.686,32.791 31.013,32.791 32.207,33.985 v1(32.207,34.773) ; U6.3 51.602,21.579 v1(51.613,21.59)
  Bottom Layer w0.25: R19.2 32.207,35.827 v1(32.207,34.773) 32.969,34.011 48.235,34.011 50.263,31.982 50.263,22.152 50.825,21.59 v1(51.613,21.59)
EX9: R20.2 STM32F103RBT6.62 U6.4 | length 44.4
  Top Layer w0.25: STM32F103RBT6.62 26.562,32.505 27.407,33.35 29.566,33.35 30.378,34.163 v1(30.378,34.773) ; U6.4 50.928,20.929 51.359,20.498 v1(51.968,20.498)
  Bottom Layer w0.25: v1(30.378,34.773) v1@30.378,34.798 ; R20.2 30.378,35.776 v1@30.378,34.798 ; v1(51.968,20.498) 50.546,20.498 49.581,21.463 49.581,31.699 47.854,33.426 31.75,33.426 v1@30.378,34.798
EX_0: J5.7 U4.21 | length 38.4
  Top Layer w0.25: v1@53.492,43.967 U4.21 U4.21@56.375,43.967 ; v1@59.579,16.297 J5.7
  Bottom Layer w0.25: v1@53.035,43.967 53.035,18.339 55.067,16.307 v1@59.639,16.307
  other v1: 59.567,16.285 53.391,43.967
EX_1: J6.7 U4.20 | length 22.3
  Top Layer w0.25: v1@53.924,43.028 54.213,43.317 U4.20 ; v1(58.17,32.11) 60.075,32.11 60.503,32.537 63.068,32.537 63.398,32.207 63.398,31.801 62.959,31.361 J6.7
  Bottom Layer w0.25: v1(53.797,42.85) 53.645,42.697 53.645,36.652 v1@58.191,32.106
EX_2: J7.7 U4.19 | length 7.4
  Top Layer w0.25: U4.19 57.029,42.667 57.082,42.72 57.148,42.72 60.242,45.815 J7.7
EX_3: J8.7 U4.18 | length 25.5
  Top Layer w0.25: v1@42.196,49.092 J8.7 ; U4.18 v1@57.46,42.017
  Bottom Layer w0.25: v1@42.164,49.098 56.983,49.098 57.383,48.699 v1(57.383,41.995)
  other v1: 42.168,49.077
EX_4: J9.7 U4.17 | length 44.2
  Top Layer w0.25: v1(27.067,49.158) J9.7 ; U4.17 56.703,41.367 56.845,41.224 57.937,41.224 v1(58.501,41.788)
  Bottom Layer w0.25: v1@27.046,49.149 27.681,48.514 31.979,48.514 33.274,49.809 57.2,49.809 58.039,48.971 58.039,42.443 58.501,41.981 v1(58.501,41.788)
EX_5: J10.7 U4.16 | length 62.9
  Top Layer w0.25: v1(11.307,49.966) 12.425,49.966 12.589,50.13 J10.7 ; U4.16 58.064,40.717 v1@58.42,40.361
  Bottom Layer w0.25: v1@11.252,49.987 30.226,49.987 30.759,50.521 57.531,50.521 58.776,49.276 58.776,42.697 59.411,42.062 59.411,40.945 58.776,40.31 v1(58.42,40.31)
EX_6: J11.7 U4.15 | length 73.6
  Top Layer w0.25: J11.7 v1@8.208,44.188 ; U4.15 57.241,40.067 58.014,39.294 v1@58.725,39.294
  Bottom Layer w0.25: v1(8.23,44.171) 8.915,44.856 8.915,49.022 11.1,51.206 57.815,51.206 59.461,49.56 59.461,42.977 60.122,42.316 60.122,40.157 59.237,39.272 v1(58.703,39.272)
EX_7: J12.7 U4.14 | length 74.8
  Top Layer w0.25: J12.7 8.036,29.55 8.814,30.328 v1(8.814,36.17) ; v1@43.231,37.059 v1(43.307,37.059) 51.511,37.059 53.869,39.417 U4.14
  Bottom Layer w0.25: v1@8.814,36.093 v1(8.814,36.17) 8.814,42.037 9.677,42.901 9.677,47.015 11.836,49.174 24.613,49.174 26.924,46.863 31.293,46.863 34.188,43.967 34.188,40.818 37.948,37.059 v1(43.307,37.059)
EX_8: J13.7 U6.21 | length 19.4
  Top Layer w0.25: J13.7 46.729,6.883 46.729,7.618 47.341,8.23 v1(47.371,8.23) ; v1@47.371,10.566 48.235,10.566 52.705,15.037 52.705,19.431 54.203,20.929 U6.21
  Bottom Layer w0.25: v1(47.35,10.545) 47.371,10.524 v1(47.371,8.23)
EX_9: J14.7 U6.20 | length 56.8
  Top Layer w0.25: J14.7 13.335,7.696 13.564,7.925 19.177,7.925 20.574,6.528 20.574,5.207 21.768,4.013 35.916,4.013 37.008,5.105 37.008,7.468 39.192,9.652 48.514,9.652 53.315,14.453 53.315,19.101 54.493,20.279 U6.20
GD_1: J15.2 STM32F103RBT6.8 | length 33
  Top Layer w0.25: v1(18.948,31.648) 22.708,31.648 23.624,30.732 23.831,30.732 23.978,30.878 23.978,36.805 23.467,37.316 J15.2 ; STM32F103RBT6.8 26.107,24.761 v3@26.467,25.121
  Top Layer w0.254: v3(26.365,25.4) 26.365,25.222 v3@26.467,25.121
  Bottom Layer w0.25: v1(18.948,31.648) 18.948,26.01 19.393,25.565 26.2,25.565 v3(26.365,25.4)
GD_2: J17.2 STM32F103RBT6.9 | length 24.1
  Top Layer w0.25: STM32F103RBT6.9 26.725,24.261 v2@27.686,25.222
  Top Layer w0.254: J17.2 17.179,36.624 17.45,36.353 v3(17.45,35.636)
  Bottom Layer w0.254: v3(17.45,35.636) 21.184,31.902 26.503,31.902 27.61,30.796 v2(27.61,25.171)
GD_3: J16.2 STM32F103RBT6.10 | length 64
  Top Layer w0.25: STM32F103RBT6.10 27.444,23.761 27.915,24.232 29.667,25.984 31.344,25.984 33.071,27.711 33.071,28.296 36.22,31.445 36.22,32.69 36.932,33.401 36.932,36.859 36.576,37.215 v1(36.576,37.363) ; v1(52.07,39.421) 54.127,41.478 54.381,41.478 v1(54.407,41.453) ; J16.2 55.224,49.397 55.37,49.251 55.855,49.251 55.929,49.176 56.136,49.176 57.709,50.749 60.528,50.749 61.136,50.142 61.136,49.63 58.268,46.761 v1(56.642,46.761)
  Bottom Layer w0.25: v1(36.576,37.363) 36.601,37.363 37.719,36.246 42.977,36.246 43.155,36.068 43.739,36.068 45.491,37.821 49.2,37.821 51.156,39.776 51.566,39.776 51.921,39.421 v1(52.07,39.421) ; v1(54.407,41.453) 54.407,41.504 55.321,42.418 55.321,45.441 v1(56.642,46.761)
GD_4: J18.2 STM32F103RBT6.11 | length 131.7
  Top Layer w0.25: STM32F103RBT6.11 28.138,23.261 v2(29.134,24.257)
  Top Layer w0.254: v3(55.537,7.074) 56.134,7.671 58.023,7.671 58.048,7.645 J18.2
  Bottom Layer w0.254: v2(29.134,24.257) 29.134,30.132 23.495,35.771 23.495,41.656 23.165,41.986 17.043,41.986 16.713,41.656 16.713,35.306 17.11,34.909 17.455,34.909 18.629,33.735 18.629,33.081 18.161,32.614 17.488,32.614 16.912,33.189 16.087,33.189 14.775,31.877 9.855,31.877 8.687,30.709 8.687,28.466 6.934,26.713 6.934,23.851 7.366,23.419 12.116,23.419 20.345,15.189 20.345,9.855 20.701,9.5 37.059,9.5 37.465,9.906 37.465,13.818 37.846,14.199 38.557,14.199 41.072,16.713 45.898,16.713 v3(55.537,7.074)
GND: C1.1 C2.1 C3.1 C4.1 C5.1 C6.1 C7.1 C8.1 C9.1 C10.2 C11.1 C12.1 C13.1 C14.1 C15.1 C16.1 C17.1 C18.1 C19.1 C20.1 C21.1 C22.1 C23.1 IC2.2 J1.1 J2.2 J3.3 J4.2 J5. J5.4 J6. J6.4 J7. J7.4 J8. J8.4 J9. J9.4 J10. J10.4 J11. J11.4 J12. J12.4 J13. J13.4 J14. J14.4 J15. J15.1 J16. J16.1 J17. J17.1 J18. J18.1 R1.2 R4.1 R5.1 R7.2 R9.1 R10.1 R11.1 R12.1 R13.1 R14.1 R15.1 R16.1 R18.2 R19.1 R20.1 S1.2 STM32F103RBT6.12 STM32F103RBT6.18 STM32F103RBT6.31 STM32F103RBT6.47 STM32F103RBT6.63 U1.2 U2.6 U2.7 U2.8 U3.2 U4.11 U4.12 U4.13 U4.22 U5.11 U5.12 U5.13 U5.22 U6.11 U6.12 U6.13 U6.22 USB1.1 USB1.@29.508,5.461 | length 154.1
  Top Layer w0.25: J11.4 7.385,45.688 7.976,46.279 v1(7.976,47.32) ; J4.2 J4.2@7.95,7.95 ; J10.4 14.089,49.97 ; J3.3 16.358,45.339 16.18,45.517 14.122,45.517 13.818,45.822 J1.1 13.818,48.59 14.089,48.862 14.089,49.97 ; 17.209,50.559 16.459,49.809 14.249,49.809 14.089,49.97 ; v3@22.098,22.761 STM32F103RBT6.12 ; v1(25.07,17.577) 25.705,17.577 26.062,17.934 STM32F103RBT6.18 ; v1(25.679,27.254) 25.679,27.838 26.062,28.221 STM32F103RBT6.63 ; J9.4 28.567,47.735 28.778,47.523 R13.1 ; STM32F103RBT6.31 32.562,18.162 32.842,17.882 36.058,17.882 38.56,20.384 C3.1 ; R1.2@39.814,16.002 39.84,15.977 40.919,15.977 41.478,15.418 J2.2 ; v1(42.139,7.798) 42.647,8.306 44.933,8.306 45.204,8.034 J13.4 ; J8.4 43.696,49.827 44.221,49.301 46.507,49.301 48.846,51.64 J8.@48.846,52.952 ; C12.1 47.828,25.019 48.8,25.991 U5.12 ; v1(47.854,16.379) U6.11 U6.12 ; v1(48.05,38.767) U4.12 U4.11 ; U5.11 U5.12 ; C23.1 49.949,24.509 U5.12 ; v1(53.746,44.983) 54.113,44.617 U4.22 ; v1(54.077,31.826) 54.091,31.841 U5.22 ; C22.1 55.844,25.917 U5.13 ; U6.13 56.94,15.729 57.252,15.418 v1(57.252,14.783) ; U6.22 57.393,21.579 57.633,21.819 v1(58.217,21.819) ; U4.13 57.245,38.767 v1(57.607,38.405) ; v1@60.198,14.072 v1(60.255,14.129) 60.923,14.797 J5.4 ; v1(60.604,30.277) 61.02,29.861 J6.4 ; v1(60.604,43.688) 61.231,44.315 J7.4
  Top Layer w0.254: J14.@16.285,4.833 v3(17.954,6.502) ; 21.463,32.563 21.463,35.916 22.022,36.474
  Top Layer w0.4: R14.1 R16.1 R15.1 R13.1
  Top Layer w0.5: v1(2.286,16.662) 2.337,16.612 S1.2 ; v1(7.239,21.26) 7.264,21.285 C16.1 ; C17.1 8.801,24.473 8.788,24.486 v1(8.814,24.486) ; U3.2 16.85,21.3 17.488,20.663 R18.2 ; v1(22.327,7.772) 23.393,7.772 23.965,8.344 C11.1 24.015,9.702 C10.2 ; v1(26.416,7.468) 26.758,7.126 USB1.1@26.758,5.461 ; USB1.1@32.258,5.461 32.258,7.01 v1(32.487,7.239) ; v1(33.045,39.319) 33.122,39.243 U2.8 ; v1(33.096,40.488) 33.122,40.513 U2.7 ; v1(38.379,35.382) 38.506,35.255 C4.1 ; IC2.2 42.009,19.353 42.009,20.399 C13.1 C13.1@44.859,20.599 ; R5.1 42.824,34.722 43.358,35.255 v1(44.044,35.255)
  Top Layer w0.65: 21.438,32.537 21.463,32.563
  Top Layer w0.7: C1.1 C2.1
  Top Layer w2: J10.@19.239,52.952 J9.@22.917,52.952 ; J9.@33.717,52.952 J8.@38.046,52.952
  Bottom Layer w0.25: C9.1 24.676,27.546 24.968,27.254 v1(25.679,27.254) ; 46.177,48.412 46.355,48.235 R11.1
  Bottom Layer w0.254: v3(17.954,6.502) 19.224,7.772 v1(22.327,7.772)
  Bottom Layer w0.6: C9.1 C8.1 ; R11.1 R9.1
  Bottom Layer w0.65: 21.463,32.563 21.463,40.843
  other v1: 1.27,5.207 4.089,5.232 50.14,7.112 55.55,8.153 59.385,9.068 54.051,9.601 57.201,9.601 27.127,10.262 30.429,10.363 55.702,11.074 58.979,11.354 57.48,12.7 22.504,14.554 1.651,18.669 5.461,19.66 1.219,25.324 1.118,28.956 10.414,30.429 7.493,34.671 18.313,40.157 7.391,41.072 26.822,45.669
  other v3: 22.123,22.758
  other v4: 67.158,19.787 26.975,22.631 60.325,46.533 52.934,48.387 49.098,48.489
NetC13_2: C13.2 IC2.4 | length 2.1
  Top Layer w0.5: IC2.4 45.011,21.95 C13.2
NetCharge_2: Charge.2 R8.2 | length 2.4
  Top Layer w0.5: R8.2 34.223,12.119 Charge.2
NetIC1_34: J1.3 STM32F103RBT6.46 | length 41.2
  Top Layer w0.25: J1.3 18.872,47.168 18.872,48.463 19.482,49.073 22.454,49.073 24.333,47.193 24.333,44.377 29.347,39.363 31.833,39.363 32.889,38.307 37.029,38.307 37.244,38.093 37.244,38.091 39.675,35.66 39.675,30.099 36.837,27.261 STM32F103RBT6.46
NetIC1_37: J1.2 STM32F103RBT6.49 | length 32.8
  Top Layer w0.25: J1.2 17.678,45.822 23.495,45.822 23.825,45.491 23.825,44.248 29.161,38.913 31.647,38.913 32.703,37.857 34.939,37.857 36.144,36.652 36.144,33.807 33.062,30.725 STM32F103RBT6.49
NetL1_2: L1.2 U3.1 | length 6.4
  Top Layer w0.65: U3.1 18.233,18.234 L1.2
NetPower_2: Power.2 R5.2 | length 2.1
  Top Layer w0.6: R5.2 43.171,31.036 Power.2@43.171,29.388
NetR6_2: R6.2 statu.2 | length 3.6
  Top Layer w0.3: R6.2 41.719,26.962 41.935,27.178 statu.2
NetR7_1: R7.1 U1.5 | length 3
  Top Layer w0.5: U1.5 30.156,11.424 R7.1
NetR8_1: R8.1 U1.1 | length 7.1
  Top Layer w0.508: U1.1 30.169,13.824 v1(30.201,13.792) ; R8.1 33.458,14.484 34.741,14.484 v1(34.747,14.478)
  Bottom Layer w0.508: v1(30.201,13.792) 30.912,14.503 34.722,14.503 v1(34.747,14.478)
NetR17_2: R17.2 R18.1 U3.3 | length 7.7
  Top Layer w0.35: R17.2 15.507,23.292 18.085,23.292 18.44,22.936 R18.1 ; U3.3 R18.1@18.44,22.25
NRST: C5.2 R2.1 S1.1 STM32F103RBT6.7 | length 29.5
  Top Layer w0.25: S1.1 6.065,21.686 6.807,22.428 6.807,24.892 v1(7.671,25.756) ; v2(21.742,24.206) 22.797,25.261 STM32F103RBT6.7
  Bottom Layer w0.25: v1(7.671,25.756) 14.122,25.756 16.104,23.774 20.447,23.774 ; R2.1 C5.2 20.447,22.288 20.447,23.774 ; v2(21.742,24.206) 21.488,24.206 21.057,23.774 20.447,23.774
PB12: R6.1 STM32F103RBT6.33 | length 7.7
  Top Layer w0.25: STM32F103RBT6.33 35.899,20.761 36.398,21.26 36.398,22.479 38.837,24.917 R6.1
POWER: C10.1 C11.2 Charge.1 U1.4 USB1.2 | length 18.9
  Top Layer w0.7: U1.4 25.54,11.424 C10.1 25.515,9.702 C11.2 25.946,9.271 27.965,9.271 ; USB1.2@27.988,5.461 27.988,9.248 27.965,9.271 ; USB1.2@31.028,5.461 31.028,9.271 ; Charge.1 32.223,10.466 31.028,9.271 ; 27.965,9.271 31.028,9.271
RXD1: J2.4 STM32F103RBT6.29 | length 18.8
  Top Layer w0.25: STM32F103RBT6.29 31.562,17.587 32.207,16.942 41.808,16.942 44.272,14.478 46.05,14.478 46.571,13.957 J2.4@46.571,13.068
SCL: J3.2 STM32F103RBT6.58 | length 33.7
  Top Layer w0.25: J3.2@18.872,43.612 18.872,44.577 19.482,45.187 23.063,45.187 23.19,45.06 23.19,44.247 29.083,38.354 31.496,38.354 32.443,37.407 34.602,37.407 35.611,36.398 35.611,33.91 32.993,31.293 28.981,31.293 28.562,30.873 STM32F103RBT6.58
SDA: J3.1 STM32F103RBT6.59 | length 28.4
  Top Layer w0.25: J3.1 23.038,43.637 28.829,37.846 31.293,37.846 32.182,36.957 34.29,36.957 35.154,36.093 35.154,34.09 32.865,31.801 28.575,31.801 28.062,31.287 STM32F103RBT6.59
TXD1: J2.3 STM32F103RBT6.30 | length 16.7
  Top Layer w0.25: STM32F103RBT6.30 32.062,17.875 32.537,17.399 42.342,17.399 v2@43.98,15.761
  Bottom Layer w0.25: v2(43.993,15.773) 44.018,15.748 J2.3
VCC3.3: C1.2 C2.2 C3.2 C4.2 C12.2 C19.2 C21.2 C23.2 IC2.5 J1.4 J3.4 Power.1 R2.2 statu.1 STM32F103RBT6.1 STM32F103RBT6.13 STM32F103RBT6.19 STM32F103RBT6.32 STM32F103RBT6.48 STM32F103RBT6.64 U4.1 U4.2 U5.1 U5.2 U6.1 U6.2 | length 164.5
  Top Layer w0.25: STM32F103RBT6.13 26.228,22.261 26.562,21.927 26.562,21.615 ; v2(26.391,16.688) 26.562,16.859 STM32F103RBT6.19 26.562,21.615 ; v2(34.315,19.025) 34.302,19.011 STM32F103RBT6.32 33.062,21.615 26.562,21.615 ; STM32F103RBT6.48 36.744,28.261 38.494,30.01 C4.2@38.494,32.588 ; v1(45.11,32.588) 46.281,32.588 46.834,33.141 U5.1 51.543,33.141 51.577,33.175 C21.2 ; U5.1@49.911,33.137 49.911,32.487 U5.2 ; U6.2 U6.1 v1@51.543,22.879 ; U4.2 U4.1 51.543,45.917 v1(51.587,45.872) 51.638,45.822 52.305,45.822 52.451,45.675 52.451,43.434 52.857,43.028 52.857,41.961 51.232,40.335 v1(51.232,37.998) ; v1(51.518,22.904) 51.518,24.401 C23.2@51.577,24.46
  Top Layer w0.254: STM32F103RBT6.1 25.314,28.261 25.562,28.508 STM32F103RBT6.64 25.562,32.572 27.051,34.061 v1@28.194,34.061 ; C3.2 39.853,21.984 39.886,21.95 IC2.5
  Top Layer w0.5: v2(34.315,19.025) 35.281,19.025 38.206,21.95 39.886,21.95
  Top Layer w0.6: v1@24.282,40.31 v1(24.232,40.259) 24.994,40.259 26.416,38.837 C1.2 C2.2 ; v1(37.414,32.588) 38.494,32.588 C4.2 ; IC2.5 41.062,23.383 41.097,23.419 45.199,23.419 45.199,24.892 45.196,24.895 statu.1 Power.1 ; v1(45.11,32.588) 45.171,32.528 Power.1@45.171,29.388
  Bottom Layer w0.25: R2.2 18.517,19.304 21.133,16.688 v2(26.391,16.688) v2@26.391,17.018 ; v1(51.232,37.998) 51.232,33.452 v1(51.518,33.166) v1(51.518,22.904) ; C19.2 51.577,45.883 v1(51.587,45.872)
  Bottom Layer w0.254: J3.4 15.138,44.958 19.253,44.958 J1.4
  Bottom Layer w0.6: J1.4 23.216,47.142 24.232,46.126 v1(24.232,40.259) 26.314,40.259 28.219,38.354 v1(28.219,34.087) 28.219,32.309 28.397,32.131 32.309,32.131 32.766,32.588 v1(37.414,32.588) v1(45.11,32.588)
XTAL_A: C6.2 R3.1 STM32F103RBT6.5 Y1.1 | length 12.9
  Top Layer w0.25: Y1.1 17.374,28.169 19.489,26.053 21.868,26.053 22.075,26.261 STM32F103RBT6.5
  Bottom Layer w0.25: R3.1 17.386,26.543 C6.2 17.374,28.461 Y1.1
XTAL_B: C7.2 R3.2 STM32F103RBT6.6 Y1.2 | length 23.8
  Top Layer w0.25: Y1.2 12.374,28.419 12.954,27.838 15.951,27.838 18.567,25.222 20.244,25.222 20.701,24.765 v2(20.701,24.74) 21.191,24.74 21.363,24.912 22.212,25.761 STM32F103RBT6.6
  Bottom Layer w0.25: C7.2 12.065,28.677 12.374,28.985 Y1.2 ; R3.2 15.761,25.514 16.535,24.74 20.549,24.74 v2@20.701,24.892
XTAL_C: C8.2 STM32F103RBT6.3 Y2.1 | length 8.9
  Top Layer w0.25: Y2.1 20.117,30.176 20.192,30.251 21.285,30.251 21.844,29.693 21.844,28.169 22.752,27.261 STM32F103RBT6.3
  Bottom Layer w0.25: Y2.1 23.051,30.227 C8.2
XTAL_D: C9.2 STM32F103RBT6.4 Y2.2 | length 7.8
  Top Layer w0.25: Y2.2 20.117,27.076 21.235,27.076 21.55,26.761 STM32F103RBT6.4
  Bottom Layer w0.25: Y2.2 20.117,27.864 20.726,28.473 C9.2
pads on no net: J5.8 J6.8 J7.8 J8.8 J9.8 J10.8 J11.8 J12.8 J13.8 J14.8 K1.1 K1.4 K1.5 K1.6 STM32F103RBT6.2 STM32F103RBT6.24 STM32F103RBT6.25 STM32F103RBT6.34 STM32F103RBT6.35 STM32F103RBT6.36 STM32F103RBT6.37 STM32F103RBT6.38 STM32F103RBT6.39 STM32F103RBT6.40 STM32F103RBT6.45 STM32F103RBT6.50 STM32F103RBT6.51 STM32F103RBT6.52 STM32F103RBT6.56 STM32F103RBT6.57 U6.10 U6.14 USB1.@29.008,5.461 USB1.@30.008,5.461

## Polygon pours and split planes (outlines as drawn)
GND on Bottom Layer "Top Layer-No Net 1" (solid, remove dead copper, pour order 2): 0,1 0,57 1,58 68,58 69,57 69,1 68,0 1,0
no net on Top Layer "Top Layer-No Net" (solid, remove dead copper, pour order 8): 17.704,37.414
GND on Top Layer "Top Layer-No Net 1" (solid, remove dead copper, pour order 4): 0,1 0,57 1,58 68,58 69,57 69,1 68,0 1,0

## Other copper
Top Layer:
  region net +5: 56.698,7.337 57.661,7.337 57.683,7.315 57.683,5.232 57.683,5.105 57.074,5.359
  region net +5: 56.337,52.426 56.591,52.426 56.54,50.216 56.007,50.216 55.651,51.41 55.855,51.714 55.855,52.045
  region net +5: 55.601,51.41 55.626,51.384 56.236,51.384 56.236,50.267 56.261,50.241 55.753,50.241
  region net +5: 16.866,37.77 17.17,37.465 17.678,37.465 18.186,36.957 19.634,36.957 19.66,36.932 19.583,36.855 19.583,36.195 18.263,36.195 17.475,36.982 15.672,36.982 15.672,37.668 15.57,37.77
  pour cut-out: 10.262,18.948 19.279,18.948 19.304,18.923 19.304,10.16 10.287,10.16 10.287,18.898 10.312,18.923
  pour cut-out: 43.409,32.131 44.958,32.131 45.085,32.004 45.085,31.623 43.485,31.623 43.434,31.674
  pour cut-out: 12.089,25.259 12.089,22.023 12.319,21.793 15.413,21.793 15.672,22.052 15.672,24.968 14.834,25.806 12.344,25.806 12.065,25.527
  pour cut-out: 10.465,20.701 15.765,20.701 16.116,20.35 16.116,18.834 16.078,18.796 10.414,18.796 10.262,18.948 10.262,20.498
  pour cut-out: 34.302,15.191 34.302,9.92 34.366,9.855 32.639,9.855 32.487,10.008 32.487,15.113 32.588,15.215
  pour cut-out: 33.807,48.895 33.801,42.656 37.694,42.656 37.694,39.395 38.583,38.506 41.605,38.506 41.885,38.786 41.885,48.375 41.294,48.966 38.374,48.966 38.303,48.895 38.303,46.736 38.151,46.584 36.678,46.584 36.373,46.888 36.373,48.666 36.144,48.895
Bottom Layer:
  pour cut-out: 57.339,46.436

## Silkscreen, mask and mechanical layers (free items; w line width, h text height)
Top Overlay:
  text "GND" at 12.522,48.768 h0.6
  text "CLK" at 15.697,48.768 h0.6
  text "IO" at 18.694,48.768 h0.6
  text "VCC" at 20.574,48.743 h0.6
  text "VCC" at 12.675,45.085 h0.6
  text "SCL" at 18.364,45.085 h0.6
  text "SDA" at 20.803,45.06 h0.6
  text "+" at 45.949,27.838 h0.9
  text "+" at 45.206,26.137 h0.9 r270
  text "+5" at 37.668,14.834 h0.9
  text "GND" at 40.081,14.707 h0.9
  text "+" at 31.166,10.668 h0.9
  text "TXD" at 42.875,10.389 h0.9
  text "RXD" at 46.304,10.389 h0.9
  text "+" at 9.398,9.906 h0.9
Mechanical 1:
  the board outline again, w0.254

## Text inside footprints (layer, text, board x,y; h text height)
IC2: Mechanical 15 "1" at 42.176,21.1 h0.9 r180